# EAGLE board pixelAdapter_f103c8 pro-Panel (EAGLE 9.5.2)
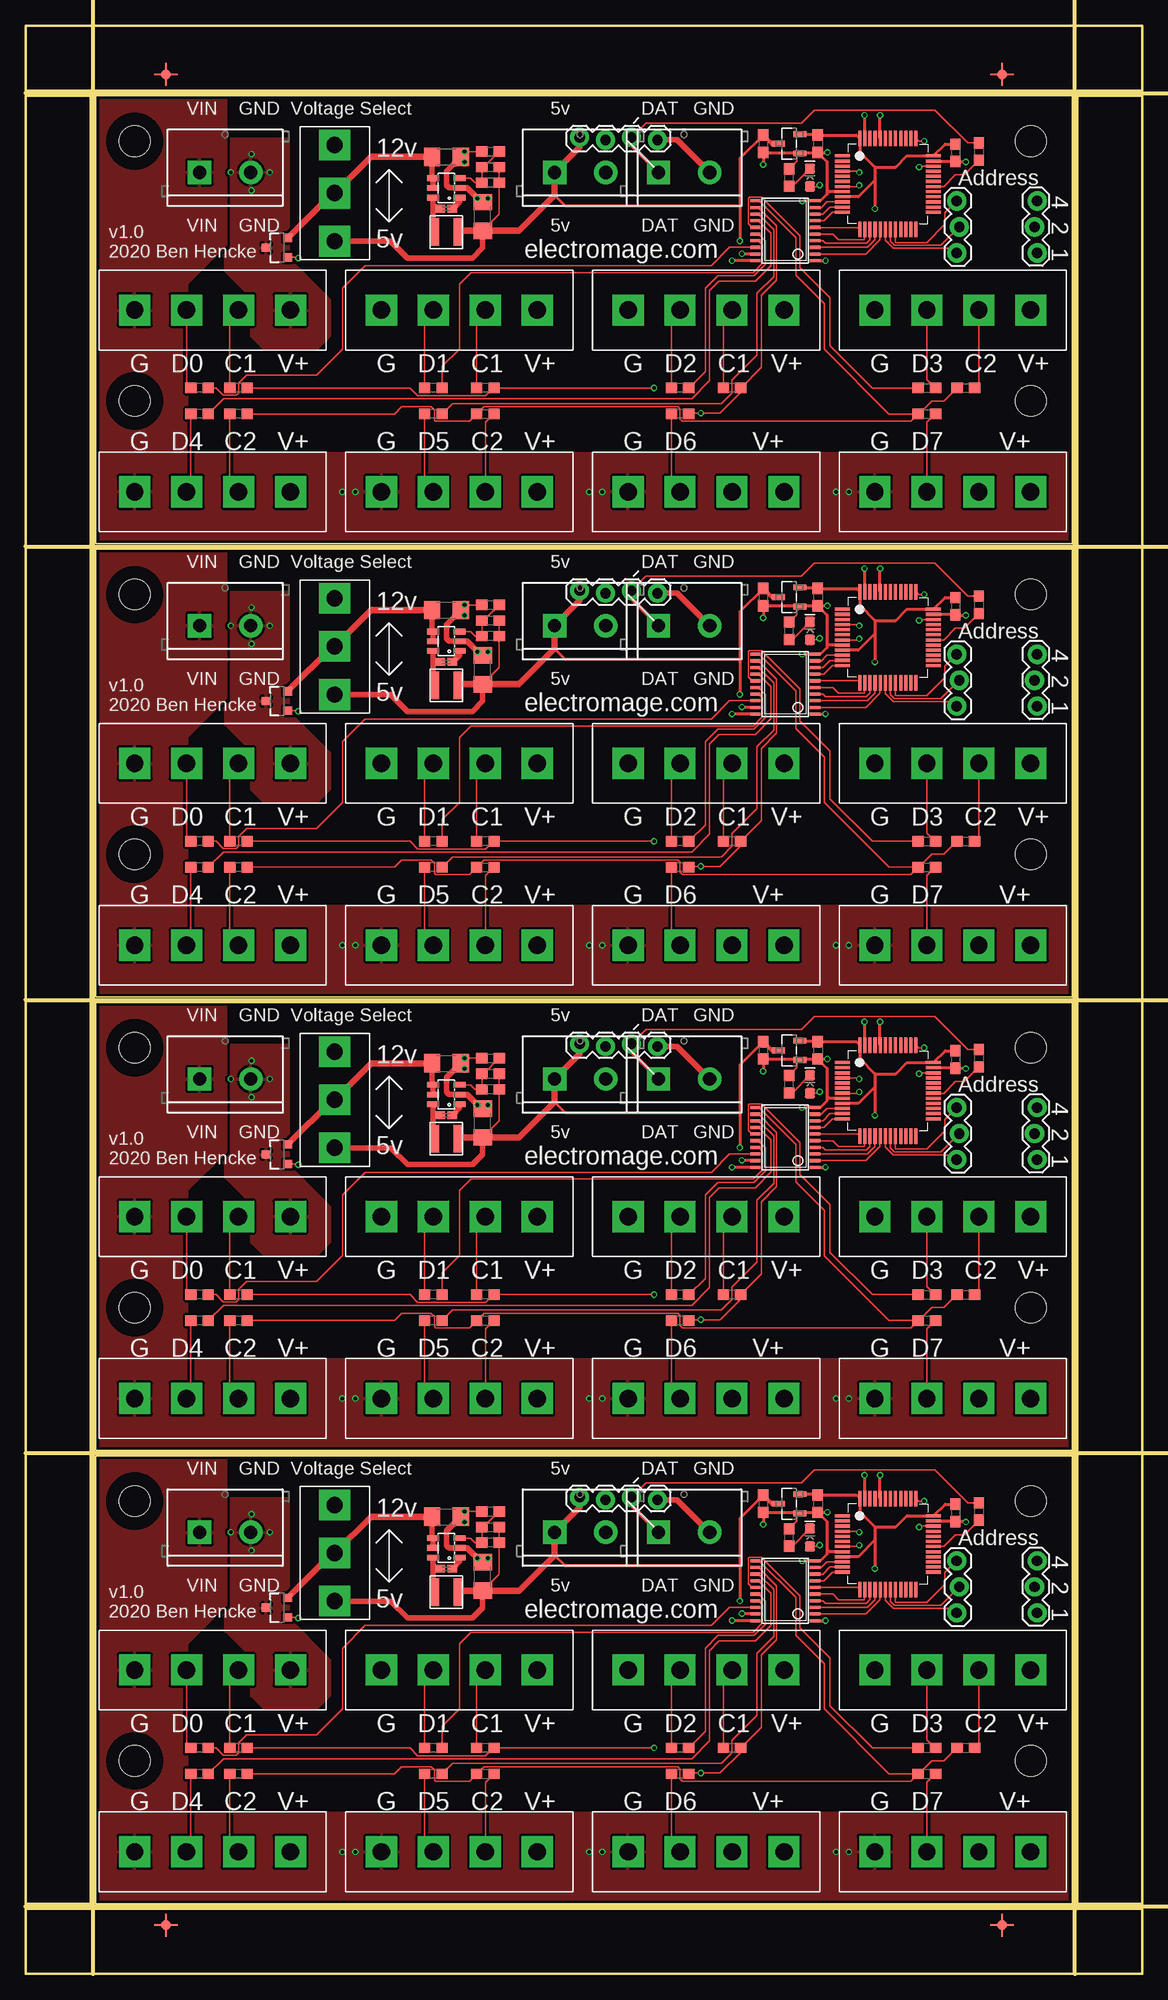
[diagram p0: board, top side]
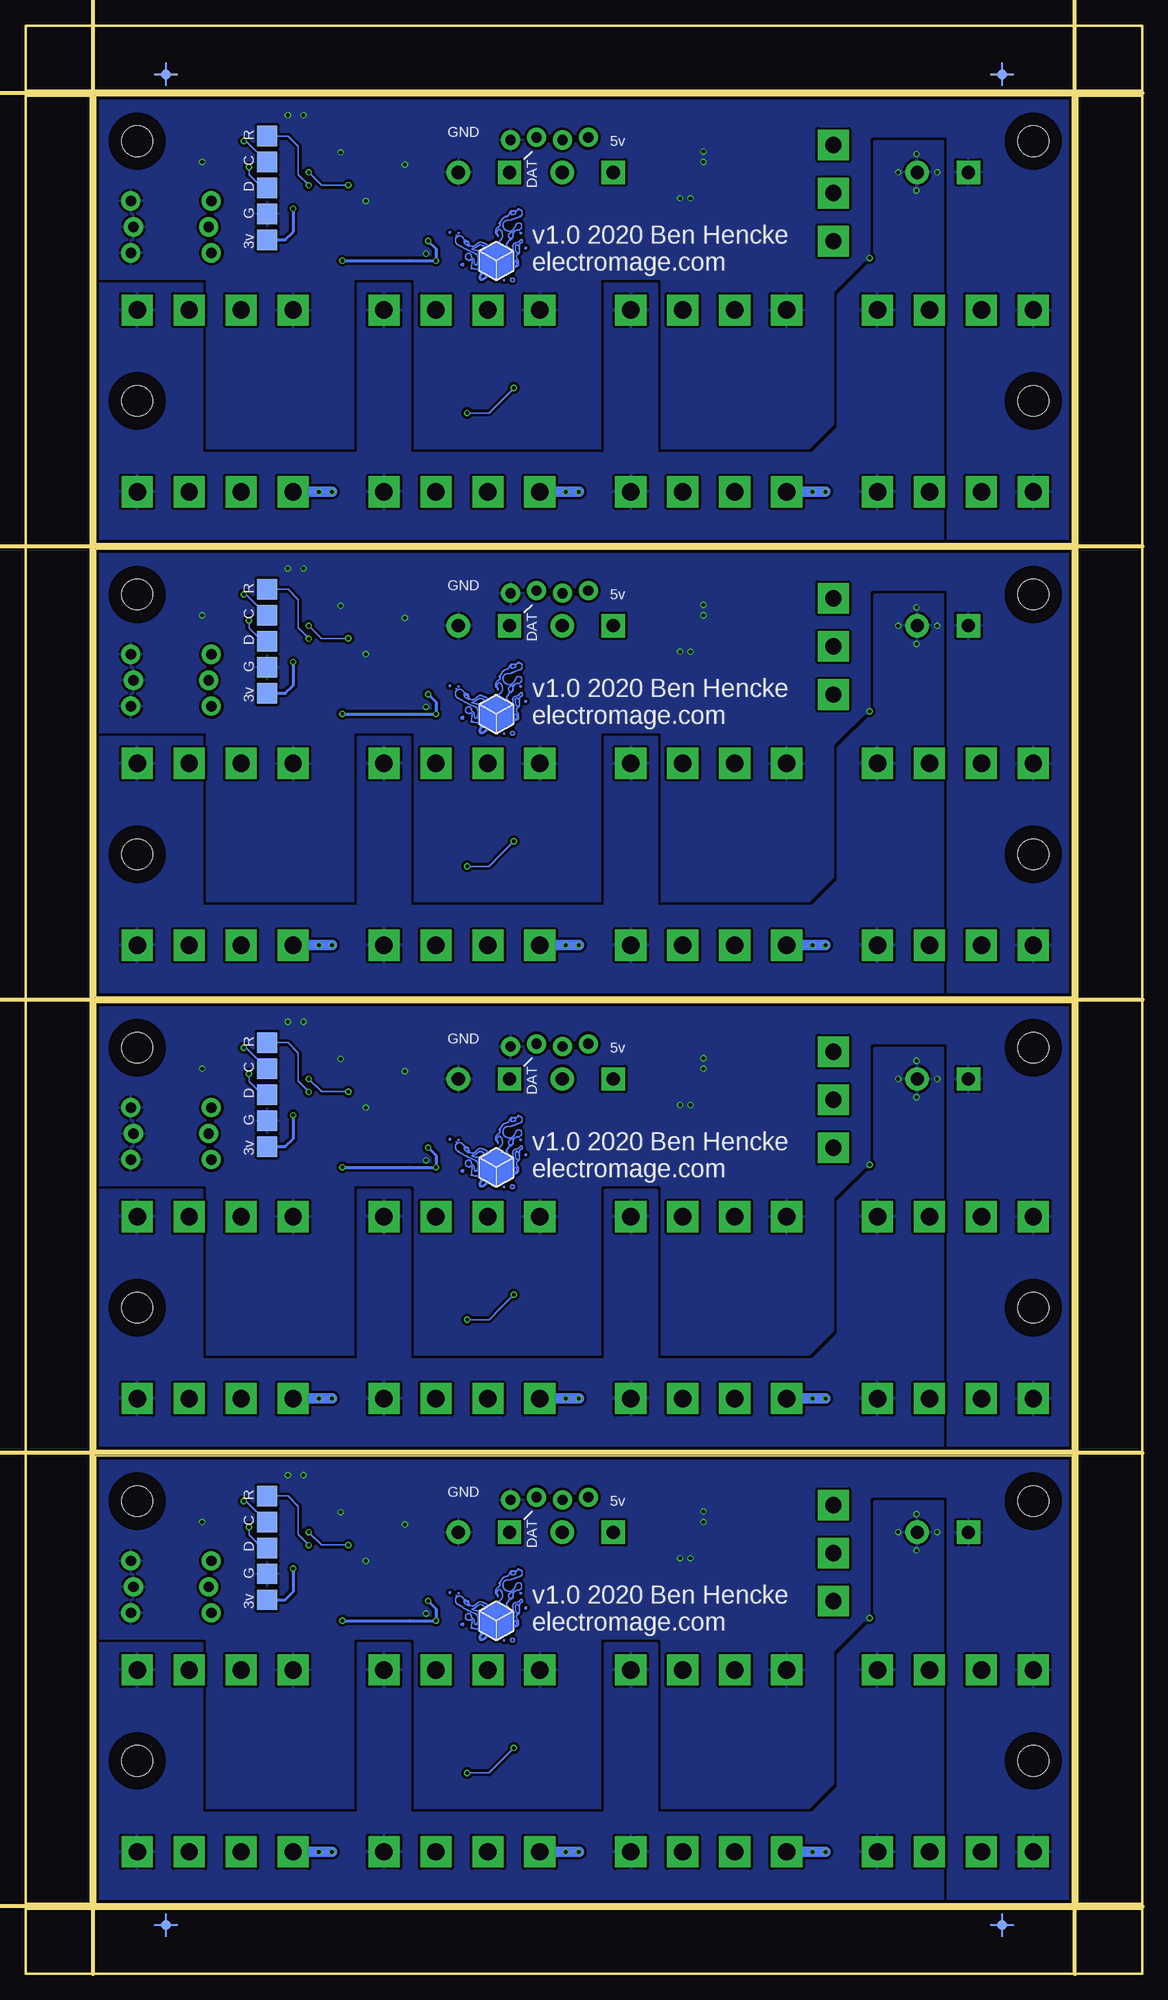
[diagram p1: board, bottom side, seen from below]

Size 109.22 x 190.5 mm. Coordinates in mm from the lower left corner, seen from the top.
Outline: 6.86,6.86 102.36,6.86 102.36,50.67 6.86,50.67 6.86,6.86
Outline: 6.86,51.18 102.36,51.18 102.36,95 6.86,95 6.86,51.18
Outline: 6.86,95.5 102.36,95.5 102.36,139.32 6.86,139.32 6.86,95.5
Outline: 6.86,139.83 102.36,139.83 102.36,183.64 6.86,183.64 6.86,139.83
Outline: 0,6.35 109.22,6.35 109.22,0 0,0 0,6.35
Outline: 102.87,183.64 109.22,183.64 109.22,6.86 102.87,6.86 102.87,183.64
Outline: 0,190.5 109.22,190.5 109.22,184.15 0,184.15 0,190.5
Outline: 0,183.64 6.35,183.64 6.35,6.86 0,6.86 0,183.64
Copper layers (1*2*15*16): Top 0.035559375mm / dielectric 0.47751875mm / Route2 0.035559375mm / dielectric 0.47751875mm / Route15 0.035559375mm / dielectric 0.47751875mm / Bottom 0.035559375mm
Design rules "SparkFun-4-layer-FAB-LIMIT *": minimum track width 4mil, minimum drill 6mil, track to track 5mil, track to pad 5mil, pad to pad 5mil, via to via 5mil, smd to smd 5mil, copper to edge 4mil, drill to drill 4mil, minimum pad ring 5mil, minimum via ring 5mil, stop-mask expansion 1mil, vias tented up to drill 25mil, thermal gap 10mil
Holes 3 mm at 10.67,20.83 98.3,20.83 10.67,46.23 98.3,46.23 10.67,65.15 98.3,65.15 10.67,90.55 98.3,90.55 10.67,109.47 98.3,109.47 10.67,134.87 98.3,134.87 10.67,153.8 98.3,153.8 10.67,179.2 98.3,179.2
tRestrict: area 9.4,19.6 to 11.9,22.1; area 9.4,45 to 11.9,47.5; area 97,45 to 99.6,47.5; area 97,19.6 to 99.6,22.1; area 9.4,63.9 to 11.9,66.4; area 9.4,89.3 to 11.9,91.8; area 97,89.3 to 99.6,91.8; area 97,63.9 to 99.6,66.4; area 9.4,108.2 to 11.9,110.7; area 9.4,133.6 to 11.9,136.1; area 97,133.6 to 99.6,136.1; area 97,108.2 to 99.6,110.7; 4 more areas
bRestrict: area 9.4,19.6 to 11.9,22.1; area 9.4,45 to 11.9,47.5; area 97,45 to 99.6,47.5; area 97,19.6 to 99.6,22.1; area 9.4,63.9 to 11.9,66.4; area 9.4,89.3 to 11.9,91.8; area 97,89.3 to 99.6,91.8; area 97,63.9 to 99.6,66.4; area 9.4,108.2 to 11.9,110.7; area 9.4,133.6 to 11.9,136.1; area 97,133.6 to 99.6,136.1; area 97,108.2 to 99.6,110.7; 4 more areas
Milling: 7 lines

## Footprints (pad centres in the part's own frame; a part is rotated, then mirrored left to right if it is on the bottom)
0603 = smd 1.1 x 1: 1 -0.85,0; 2 0.85,0
1206 = smd 1.6 x 1.8: 1 -1.4,0; 2 1.4,0
C0402K = smd 0.925 x 0.74: 1 -0.6,0; 2 0.6,0
LED-0603 = smd 1 x 1: A -0.877,0; C 0.877,0
BENSFIDUCIAL-SMALL = smd 1 x 1: 1 0,0 | smd 0.152 x 0.762: P$1 0,0.762; P$2 0,-0.762 | smd 0.762 x 0.152: P$3 0.762,0; P$4 -0.762,0
SCREWTERMINAL-5MM-2 = drill 1.3 pad 2.286 square: 1 0,0 | drill 1.3 pad 2.286: 2 5,0
1X03_LOCK = drill 1.016 pad 1.88: 1 0,0.127; 2 2.54,-0.127; 3 5.08,0.127
1X04_LOCK = drill 1.016 pad 1.88: 1 0,0.127; 2 2.54,-0.127; 3 5.08,0.127; 4 7.62,-0.127
INDUCTOR-3030 = smd 0.8 x 2.7: P$1 1.1,0; P$2 -1.1,0
SOT23-3 = smd 0.8 x 0.9: 1 -0.95,-1; 2 0.95,-1; 3 0,1.1
TP20SQ = smd 2 x 2: TP 0,0
TSSOP20 = smd 0.305 x 0.991: 1 -2.925,-2.918; 2 -2.275,-2.918; 3 -1.625,-2.918; 4 -0.975,-2.918; 5 -0.325,-2.918; 6 0.325,-2.918; 7 0.975,-2.918; 8 1.625,-2.918; 9 2.275,-2.918; 10 2.925,-2.918; 11 2.925,2.918; 12 2.275,2.918; 13 1.625,2.918; 14 0.975,2.918; 15 0.325,2.918; 16 -0.325,2.918; 17 -0.975,2.918; 18 -1.625,2.918; 19 -2.275,2.918; 20 -2.925,2.918
SOT95P237X112-3N = smd 0.559 x 1.27: 1 -0.94,-1.041; 2 0.94,-1.041; 3 0,1.041
LQFP48_7X7MM_0.5MMPP = smd 1.5 x 0.3: 1 -4.45,2.75; 2 -4.45,2.25; 3 -4.45,1.75; 4 -4.45,1.25; 5 -4.45,0.75; 6 -4.45,0.25; 7 -4.45,-0.25; 8 -4.45,-0.75; 9 -4.45,-1.25; 10 -4.45,-1.75; 11 -4.45,-2.25; 12 -4.45,-2.75; 25 4.45,-2.75; 26 4.45,-2.25; 27 4.45,-1.75; 28 4.45,-1.25; 29 4.45,-0.75; 30 4.45,-0.25; 31 4.45,0.25; 32 4.45,0.75; 33 4.45,1.25; 34 4.45,1.75; 35 4.45,2.25; 36 4.45,2.75 | smd 0.3 x 1.5: 13 -2.75,-4.45; 14 -2.25,-4.45; 15 -1.75,-4.45; 16 -1.25,-4.45; 17 -0.75,-4.45; 18 -0.25,-4.45; 19 0.25,-4.45; 20 0.75,-4.45; 21 1.25,-4.45; 22 1.75,-4.45; 23 2.25,-4.45; 24 2.75,-4.45; 37 2.75,4.45; 38 2.25,4.45; 39 1.75,4.45; 40 1.25,4.45; 41 0.75,4.45; 42 0.25,4.45; 43 -0.25,4.45; 44 -0.75,4.45; 45 -1.25,4.45; 46 -1.75,4.45; 47 -2.25,4.45; 48 -2.75,4.45
CON4-508 = drill 1.7 pad 3.048 square: 1 -7.62,0; 2 -2.54,0; 3 2.54,0; 4 7.62,0
SOT23-6 = smd 0.55 x 1.2: 1 -0.95,-1.3; 2 0,-1.3; 3 0.95,-1.3; 4 0.95,1.3; 5 0,1.3; 6 -0.95,1.3
SWITCH-XKB-SS-12D10 = drill 1.6 pad 3 square: P$1 -4.7,0; P$2 0,0; P$3 4.7,0

## Placement (x,y rotation side)
C1  1.0uF  [0603]  72.14,45.97 270 top
C2  4.7uF  [0603]  77.47,45.97 270 top
C3  0.1uF  [0603]  90.93,45.08 270 top
C4  47uF  [1206]  44.7,38.86 90 top
C5  4.7uF  [1206]  41.15,44.7 0 top
C6  0.1uF  [C0402K]  41.15,39.62 180 top
C7  22pF  [0603]  45.47,42.16 180 top
C8  0.1uF  [0603]  90.93,89.41 270 top
C9  4.7uF  [0603]  77.47,90.3 270 top
C10  4.7uF  [1206]  41.15,89.03 0 top
C11  22pF  [0603]  45.47,86.49 180 top
C12  47uF  [1206]  44.7,83.19 90 top
C13  0.1uF  [C0402K]  41.15,83.95 180 top
C14  1.0uF  [0603]  72.14,90.3 270 top
C15  0.1uF  [0603]  90.93,133.73 270 top
C16  4.7uF  [0603]  77.47,134.62 270 top
C17  4.7uF  [1206]  41.15,133.35 0 top
C18  22pF  [0603]  45.47,130.81 180 top
C19  47uF  [1206]  44.7,127.51 90 top
C20  0.1uF  [C0402K]  41.15,128.27 180 top
C21  1.0uF  [0603]  72.14,134.62 270 top
C22  0.1uF  [0603]  90.93,178.05 270 top
C23  4.7uF  [0603]  77.47,178.94 270 top
C24  4.7uF  [1206]  41.15,177.67 0 top
C25  22pF  [0603]  45.47,175.13 180 top
C26  47uF  [1206]  44.7,171.83 90 top
C27  0.1uF  [C0402K]  41.15,172.59 180 top
C28  1.0uF  [0603]  72.14,178.94 270 top
D1  [LED-0603]  76.71,87 90 top
D2  [LED-0603]  76.71,42.67 90 top
D3  [LED-0603]  76.71,131.32 90 top
D4  [LED-0603]  76.71,175.64 90 top
E$1  [BENSFIDUCIAL-SMALL]  13.72,185.74 0 top
E$2  [BENSFIDUCIAL-SMALL]  13.72,185.74 0 bottom
E$3  [BENSFIDUCIAL-SMALL]  95.5,185.74 0 top
E$4  [BENSFIDUCIAL-SMALL]  95.5,185.74 0 bottom
E$5  [BENSFIDUCIAL-SMALL]  13.72,4.76 0 top
E$6  [BENSFIDUCIAL-SMALL]  13.72,4.76 0 bottom
E$7  [BENSFIDUCIAL-SMALL]  95.5,4.76 0 top
E$8  [BENSFIDUCIAL-SMALL]  95.5,4.76 0 bottom
J1  [SCREWTERMINAL-5MM-2]  17.02,43.18 0 top
J2  [1X03_LOCK]  91.19,35.31 90 top
J3  [SCREWTERMINAL-5MM-2]  51.74,43.18 0 top
J4  [SCREWTERMINAL-5MM-2]  61.9,43.18 0 top
J5  [1X04_LOCK]  61.8,46.48 180 top
J6  [1X03_LOCK]  98.81,40.39 270 top
J7  [SCREWTERMINAL-5MM-2]  51.74,87.5 0 top
J8  [SCREWTERMINAL-5MM-2]  61.9,87.5 0 top
J9  [1X04_LOCK]  61.8,90.8 180 top
J10  [SCREWTERMINAL-5MM-2]  17.02,87.5 0 top
J11  [1X03_LOCK]  91.19,79.63 90 top
J12  [1X03_LOCK]  98.81,84.71 270 top
J13  [SCREWTERMINAL-5MM-2]  51.74,131.83 0 top
J14  [SCREWTERMINAL-5MM-2]  61.9,131.83 0 top
J15  [1X04_LOCK]  61.8,135.13 180 top
J16  [SCREWTERMINAL-5MM-2]  17.02,131.83 0 top
J17  [1X03_LOCK]  91.19,123.95 90 top
J18  [1X03_LOCK]  98.81,129.03 270 top
J19  [SCREWTERMINAL-5MM-2]  51.74,176.15 0 top
J20  [SCREWTERMINAL-5MM-2]  61.9,176.15 0 top
J21  [1X04_LOCK]  61.8,179.45 180 top
J22  [SCREWTERMINAL-5MM-2]  17.02,176.15 0 top
J23  [1X03_LOCK]  91.19,168.28 90 top
J24  [1X03_LOCK]  98.81,173.36 270 top
L1  INDUCTOR3030  [INDUCTOR-3030]  41.15,81.66 180 top
L2  INDUCTOR3030  [INDUCTOR-3030]  41.15,37.34 180 top
L3  INDUCTOR3030  [INDUCTOR-3030]  41.15,125.98 180 top
L4  INDUCTOR3030  [INDUCTOR-3030]  41.15,170.31 180 top
Q1  2.5A/30V/105mΩ  [SOT23-3]  24.64,80.14 90 top
Q2  2.5A/30V/105mΩ  [SOT23-3]  24.64,124.46 90 top
Q3  2.5A/30V/105mΩ  [SOT23-3]  24.64,35.81 90 top
Q4  2.5A/30V/105mΩ  [SOT23-3]  24.64,168.78 90 top
R1  75  [0603]  17.02,22.1 180 top
R2  75  [0603]  39.88,22.1 180 top
R3  75  [0603]  64.01,22.1 180 top
R4  75  [0603]  88.14,22.1 0 top
R5  75  [0603]  17.02,19.56 180 top
R6  75  [0603]  39.88,19.56 180 top
R7  75  [0603]  64.01,19.56 180 top
R8  75  [0603]  88.14,19.56 0 top
R9  75  [0603]  93.22,45.21 270 top
R10  75  [0603]  74.68,42.67 90 top
R11  100k  [0603]  45.47,43.69 0 top
R12  13.7k  [0603]  45.47,45.21 0 top
R13  75  [0603]  20.83,22.1 180 top
R14  75  [0603]  44.96,22.1 180 top
R15  75  [0603]  69.09,22.1 180 top
R16  75  [0603]  91.95,22.1 0 top
R17  75  [0603]  20.83,19.56 180 top
R18  75  [0603]  44.96,19.56 0 top
R19  75  [0603]  17.02,66.42 180 top
R20  75  [0603]  39.88,66.42 180 top
R21  75  [0603]  64.01,66.42 180 top
R22  75  [0603]  88.14,66.42 0 top
R23  75  [0603]  17.02,63.88 180 top
R24  75  [0603]  39.88,63.88 180 top
R25  75  [0603]  64.01,63.88 180 top
R26  75  [0603]  88.14,63.88 0 top
R27  75  [0603]  74.68,87 90 top
R28  75  [0603]  93.22,89.54 270 top
R29  100k  [0603]  45.47,88.01 0 top
R30  13.7k  [0603]  45.47,89.54 0 top
R31  75  [0603]  20.83,66.42 180 top
R32  75  [0603]  44.96,66.42 180 top
R33  75  [0603]  69.09,66.42 180 top
R34  75  [0603]  91.95,66.42 0 top
R35  75  [0603]  20.83,63.88 180 top
R36  75  [0603]  44.96,63.88 0 top
R37  75  [0603]  17.02,110.74 180 top
R38  75  [0603]  39.88,110.74 180 top
R39  75  [0603]  64.01,110.74 180 top
R40  75  [0603]  88.14,110.74 0 top
R41  75  [0603]  17.02,108.2 180 top
R42  75  [0603]  39.88,108.2 180 top
R43  75  [0603]  64.01,108.2 180 top
R44  75  [0603]  88.14,108.2 0 top
R45  75  [0603]  74.68,131.32 90 top
R46  75  [0603]  93.22,133.86 270 top
R47  100k  [0603]  45.47,132.33 0 top
R48  13.7k  [0603]  45.47,133.86 0 top
R49  75  [0603]  20.83,110.74 180 top
R50  75  [0603]  44.96,110.74 180 top
R51  75  [0603]  69.09,110.74 180 top
R52  75  [0603]  91.95,110.74 0 top
R53  75  [0603]  20.83,108.2 180 top
R54  75  [0603]  44.96,108.2 0 top
R55  75  [0603]  17.02,155.07 180 top
R56  75  [0603]  39.88,155.07 180 top
R57  75  [0603]  64.01,155.07 180 top
R58  75  [0603]  88.14,155.07 0 top
R59  75  [0603]  17.02,152.53 180 top
R60  75  [0603]  39.88,152.53 180 top
R61  75  [0603]  64.01,152.53 180 top
R62  75  [0603]  88.14,152.53 0 top
R63  75  [0603]  74.68,175.64 90 top
R64  75  [0603]  93.22,178.18 270 top
R65  100k  [0603]  45.47,176.66 0 top
R66  13.7k  [0603]  45.47,178.18 0 top
R67  75  [0603]  20.83,155.07 180 top
R68  75  [0603]  44.96,155.07 180 top
R69  75  [0603]  69.09,155.07 180 top
R70  75  [0603]  91.95,155.07 0 top
R71  75  [0603]  20.83,152.53 180 top
R72  75  [0603]  44.96,152.53 0 top
TP1  TPTP20SQ  [TP20SQ]  85.6,44.2 0 bottom
TP2  TPTP20SQ  [TP20SQ]  85.6,41.66 0 bottom
TP3  TPTP20SQ  [TP20SQ]  85.6,39.12 0 bottom
TP4  TPTP20SQ  [TP20SQ]  85.6,36.58 0 bottom
TP5  TPTP20SQ  [TP20SQ]  85.6,46.74 180 bottom
TP6  TPTP20SQ  [TP20SQ]  85.6,88.52 0 bottom
TP7  TPTP20SQ  [TP20SQ]  85.6,85.98 0 bottom
TP8  TPTP20SQ  [TP20SQ]  85.6,83.44 0 bottom
TP9  TPTP20SQ  [TP20SQ]  85.6,80.9 0 bottom
TP10  TPTP20SQ  [TP20SQ]  85.6,91.06 180 bottom
TP11  TPTP20SQ  [TP20SQ]  85.6,132.84 0 bottom
TP12  TPTP20SQ  [TP20SQ]  85.6,130.3 0 bottom
TP13  TPTP20SQ  [TP20SQ]  85.6,127.76 0 bottom
TP14  TPTP20SQ  [TP20SQ]  85.6,125.22 0 bottom
TP15  TPTP20SQ  [TP20SQ]  85.6,135.38 180 bottom
TP16  TPTP20SQ  [TP20SQ]  85.6,177.16 0 bottom
TP17  TPTP20SQ  [TP20SQ]  85.6,174.62 0 bottom
TP18  TPTP20SQ  [TP20SQ]  85.6,172.09 0 bottom
TP19  TPTP20SQ  [TP20SQ]  85.6,169.55 0 bottom
TP20  TPTP20SQ  [TP20SQ]  85.6,179.71 180 bottom
U1  SN74HCT245PWR  [TSSOP20]  74.3,37.46 90 top
U2  AP2120N-3.3TRG1  [SOT95P237X112-3N]  74.68,45.97 90 top
U3  SN74HCT245PWR  [TSSOP20]  74.3,81.79 90 top
U4  AP2120N-3.3TRG1  [SOT95P237X112-3N]  74.68,90.3 90 top
U5  SN74HCT245PWR  [TSSOP20]  74.3,126.11 90 top
U6  AP2120N-3.3TRG1  [SOT95P237X112-3N]  74.68,134.62 90 top
U7  SN74HCT245PWR  [TSSOP20]  74.3,170.43 90 top
U8  AP2120N-3.3TRG1  [SOT95P237X112-3N]  74.68,178.94 90 top
U$1  STM32F103C8T6  [LQFP48_7X7MM_0.5MMPP]  84.33,42.04 0 top
U$2  CON4-508  [CON4-508]  18.29,29.72 0 top
U$3  CON4-508  [CON4-508]  42.42,29.72 0 top
U$4  SY8120B1ABC  [SOT23-6]  41.15,41.66 90 top
U$5  CON4-508  [CON4-508]  66.55,29.72 0 top
U$6  CON4-508  [CON4-508]  90.68,29.72 0 top
U$7  CON4-508  [CON4-508]  18.29,11.94 0 top
U$8  CON4-508  [CON4-508]  42.42,11.94 0 top
U$9  CON4-508  [CON4-508]  66.55,11.94 0 top
U$10  CON4-508  [CON4-508]  90.68,11.94 0 top
U$11  SWITCH-SPDTXKB-SS-12D10  [SWITCH-XKB-SS-12D10]  30.23,41.15 270 top
U$12  [ELECTRO_MAGE_PCB4_PIXEL_2#PNG]  64.01,36.07 0 bottom
U$13  STM32F103C8T6  [LQFP48_7X7MM_0.5MMPP]  84.33,86.36 0 top
U$14  SY8120B1ABC  [SOT23-6]  41.15,85.98 90 top
U$15  CON4-508  [CON4-508]  18.29,74.04 0 top
U$16  CON4-508  [CON4-508]  42.42,74.04 0 top
U$17  CON4-508  [CON4-508]  66.55,74.04 0 top
U$18  CON4-508  [CON4-508]  90.68,74.04 0 top
U$19  CON4-508  [CON4-508]  18.29,56.26 0 top
U$20  CON4-508  [CON4-508]  42.42,56.26 0 top
U$21  CON4-508  [CON4-508]  66.55,56.26 0 top
U$22  CON4-508  [CON4-508]  90.68,56.26 0 top
U$23  SWITCH-SPDTXKB-SS-12D10  [SWITCH-XKB-SS-12D10]  30.23,85.47 270 top
U$24  [ELECTRO_MAGE_PCB4_PIXEL_2#PNG]  64.01,80.39 0 bottom
U$25  STM32F103C8T6  [LQFP48_7X7MM_0.5MMPP]  84.33,130.68 0 top
U$26  SY8120B1ABC  [SOT23-6]  41.15,130.3 90 top
U$27  CON4-508  [CON4-508]  18.29,118.36 0 top
U$28  CON4-508  [CON4-508]  42.42,118.36 0 top
U$29  CON4-508  [CON4-508]  66.55,118.36 0 top
U$30  CON4-508  [CON4-508]  90.68,118.36 0 top
U$31  CON4-508  [CON4-508]  18.29,100.58 0 top
U$32  CON4-508  [CON4-508]  42.42,100.58 0 top
U$33  CON4-508  [CON4-508]  66.55,100.58 0 top
U$34  CON4-508  [CON4-508]  90.68,100.58 0 top
U$35  SWITCH-SPDTXKB-SS-12D10  [SWITCH-XKB-SS-12D10]  30.23,129.79 270 top
U$36  [ELECTRO_MAGE_PCB4_PIXEL_2#PNG]  64.01,124.71 0 bottom
U$37  STM32F103C8T6  [LQFP48_7X7MM_0.5MMPP]  84.33,175.01 0 top
U$38  SY8120B1ABC  [SOT23-6]  41.15,174.62 90 top
U$39  CON4-508  [CON4-508]  18.29,162.69 0 top
U$40  CON4-508  [CON4-508]  42.42,162.69 0 top
U$41  CON4-508  [CON4-508]  66.55,162.69 0 top
U$42  CON4-508  [CON4-508]  90.68,162.69 0 top
U$43  CON4-508  [CON4-508]  18.29,144.91 0 top
U$44  CON4-508  [CON4-508]  42.42,144.91 0 top
U$45  CON4-508  [CON4-508]  66.55,144.91 0 top
U$46  CON4-508  [CON4-508]  90.68,144.91 0 top
U$47  SWITCH-SPDTXKB-SS-12D10  [SWITCH-XKB-SS-12D10]  30.23,174.12 270 top
U$48  [ELECTRO_MAGE_PCB4_PIXEL_2#PNG]  64.01,169.04 0 bottom

## Library data of the parts
C1 C14 C21 C28 = SparkFun-Capacitors; PROD_ID: CAP-00868
C2 C9 C16 C23 = SparkFun-Capacitors; PROD_ID: CAP-08280
C3 C8 C15 C22 = SparkFun-Capacitors; PROD_ID: CAP-00810
C4 C5 C10 C12 C17 C19 C24 C26 = SparkFun-Capacitors; PROD_ID: CAP-10300
C6 C13 C20 C27 = adafruit
C7 C11 C18 C25 = SparkFun-Capacitors; PROD_ID: CAP-07876
D1-D4 = SparkFun-LED
E$1-E$8 L1-L4 U$2-U$11 U$14-U$23 U$26-U$35 U$38-U$47 = bens
J1 J3 J4 J7 J8 J10 J13 J14 J16 J19 J20 J22 = bens; SF_SKU: PRT-08432
J2 J6 J11 J12 J17 J18 J23 J24 = SparkFun-Connectors
J5 J9 J15 J21 = SparkFun-Connectors; PROD_ID: CONN-09696
Q1-Q4 = SparkFun-DiscreteSemi; PROD_ID: TRANS-11308
R1-R10 R13-R28 R31-R46 R49-R64 R67-R72 = SparkFun-Resistors; PROD_ID: RES-12438
R11 R29 R47 R65 = SparkFun-Resistors; PROD_ID: RES-07828
R12 R30 R48 R66 = SparkFun-Resistors; PROD_ID: RES-08603
TP1-TP20 = testpad
U1 U3 U5 U7 = scanlime
U2 U4 U6 U8 = Microchip_By_element14_Batch_1; MPN: MCP1700T-3302E/TT; OC_FARNELL: 1296592; OC_NEWARK: 88H9817; PACKAGE: SOT23-3; SUPPLIER: Microchip
U$1 U$13 U$25 U$37 = STM32F103C8T6; AVAILABILITY: Unavailable; DESCRIPTION: Mainstream Performance line, ARM Cortex-M3 MCU with 64 Kbytes Flash, 72 MHz CPU, motor control, USB and CAN; MF: STMicroelectronics; MP: STM32F103C8T6; PACKAGE: LQFP-48 STMicroelectronics; PRICE: None
U$12 U$24 U$36 U$48 = Electro_Mage_pcb4_pixel_6

## Nets
+3V1: C8.1 C9.1 TP9.TP U4.2 U$13.9 U$13.36 U$13.48
+3V2: C15.1 C16.1 TP14.TP U6.2 U$25.9 U$25.36 U$25.48
+3V3: C2.1 C3.1 TP4.TP U2.2 U$1.9 U$1.36 U$1.48
+3V4: C22.1 C23.1 TP19.TP U8.2 U$37.9 U$37.36 U$37.48
+5V: C1.1 C4.1 C7.1 J3.1 J5.4 L2.P$2 R11.2 U1.1 U1.20 U2.3 U$11.P$3
+5V1: C11.1 C12.1 C14.1 J7.1 J9.4 L1.P$2 R29.2 U3.1 U3.20 U4.3 U$23.P$3
+5V2: C18.1 C19.1 C21.1 J13.1 J15.4 L3.P$2 R47.2 U5.1 U5.20 U6.3 U$35.P$3
+5V3: C25.1 C26.1 C28.1 J19.1 J21.4 L4.P$2 R65.2 U7.1 U7.20 U8.3 U$47.P$3
ADDR0: J2.1 U$1.18
ADDR1: J2.2 U$1.19
ADDR2: J2.3 U$1.20
ADDR3: J11.1 U$13.18
ADDR4: J11.2 U$13.19
ADDR5: J11.3 U$13.20
ADDR6: J17.1 U$25.18
ADDR7: J17.2 U$25.19
ADDR8: J17.3 U$25.20
ADDR9: J23.1 U$37.18
ADDR10: J23.2 U$37.19
ADDR11: J23.3 U$37.20
CH0: U1.2 U$1.17
CH1: U1.3 U$1.16
CH2: U1.4 U$1.15
CH3: U1.5 U$1.14
CH4: U1.6 U$1.13
CH5: U1.7 U$1.12
CH6: U1.8 U$1.11
CH7: U1.9 U$1.10
CH8: U3.9 U$13.10
CH9: U3.8 U$13.11
CH10: U3.7 U$13.12
CH11: U3.2 U$13.17
CH12: U3.3 U$13.16
CH13: U3.4 U$13.15
CH14: U3.5 U$13.14
CH15: U3.6 U$13.13
CH16: U5.9 U$25.10
CH17: U5.8 U$25.11
CH18: U5.7 U$25.12
CH19: U5.2 U$25.17
CH20: U5.3 U$25.16
CH21: U5.4 U$25.15
CH22: U5.5 U$25.14
CH23: U5.6 U$25.13
CH24: U7.9 U$37.10
CH25: U7.8 U$37.11
CH26: U7.7 U$37.12
CH27: U7.2 U$37.17
CH28: U7.3 U$37.16
CH29: U7.4 U$37.15
CH30: U7.5 U$37.14
CH31: U7.6 U$37.13
GND: C1.2 C2.2 C3.2 C4.2 C5.2 J1.1 J4.2 J5.1 J6.1 J6.2 J6.3 Q3.1 R10.2 R12.1 TP3.TP U1.10 U1.19 U2.1 U$1.8 U$1.35 U$1.44 U$1.47 U$2.1 U$3.1 U$4.2 U$5.1 U$6.1 U$7.1 U$8.1 U$9.1 U$10.1
GND1: C8.2 C9.2 C10.2 C12.2 C14.2 J8.2 J9.1 J10.1 J12.1 J12.2 J12.3 Q1.1 R27.2 R30.1 TP8.TP U3.10 U3.19 U4.1 U$13.8 U$13.35 U$13.44 U$13.47 U$14.2 U$15.1 U$16.1 U$17.1 U$18.1 U$19.1 U$20.1 U$21.1 U$22.1
GND2: C15.2 C16.2 C17.2 C19.2 C21.2 J14.2 J15.1 J16.1 J18.1 J18.2 J18.3 Q2.1 R45.2 R48.1 TP13.TP U5.10 U5.19 U6.1 U$25.8 U$25.35 U$25.44 U$25.47 U$26.2 U$27.1 U$28.1 U$29.1 U$30.1 U$31.1 U$32.1 U$33.1 U$34.1
GND3: C22.2 C23.2 C24.2 C26.2 C28.2 J20.2 J21.1 J22.1 J24.1 J24.2 J24.3 Q4.1 R63.2 R66.1 TP18.TP U7.10 U7.19 U8.1 U$37.8 U$37.35 U$37.44 U$37.47 U$38.2 U$39.1 U$40.1 U$41.1 U$42.1 U$43.1 U$44.1 U$45.1 U$46.1
LED0: R1.2 U$2.2
LED1: R2.2 U$3.2
LED2: R3.2 U$5.2
LED3: R4.2 U$6.2
LED4: R5.2 U$7.2
LED5: R6.2 U$8.2
LED6: R7.2 U$9.2
LED7: R8.2 U$10.2
LED8: R24.2 U$20.2
LED9: R23.2 U$19.2
LED10: R22.2 U$18.2
LED11: R21.2 U$17.2
LED12: R20.2 U$16.2
LED13: R19.2 U$15.2
LED14: R25.2 U$21.2
LED15: R26.2 U$22.2
LED16: R42.2 U$32.2
LED17: R41.2 U$31.2
LED18: R40.2 U$30.2
LED19: R39.2 U$29.2
LED20: R38.2 U$28.2
LED21: R37.2 U$27.2
LED22: R43.2 U$33.2
LED23: R44.2 U$34.2
LED24: R60.2 U$44.2
LED25: R59.2 U$43.2
LED26: R58.2 U$42.2
LED27: R57.2 U$41.2
LED28: R56.2 U$40.2
LED29: R55.2 U$39.2
LED30: R61.2 U$45.2
LED31: R62.2 U$46.2
LEDS0: R1.1 U1.18
LEDS1: R2.1 U1.17
LEDS2: R3.1 U1.16
LEDS3: R4.1 U1.15
LEDS4: R5.1 U1.14
LEDS5: R6.1 U1.13
LEDS6: R7.1 R13.1 R14.1 R15.1 U1.12
LEDS7: R8.1 R16.1 R17.1 R18.1 U1.11
LEDS8: R19.1 U3.18
LEDS9: R20.1 U3.17
LEDS10: R21.1 U3.16
LEDS11: R22.1 U3.15
LEDS12: R23.1 U3.14
LEDS13: R24.1 U3.13
LEDS14: R25.1 R31.1 R32.1 R33.1 U3.12
LEDS15: R26.1 R34.1 R35.1 R36.1 U3.11
LEDS16: R37.1 U5.18
LEDS17: R38.1 U5.17
LEDS18: R39.1 U5.16
LEDS19: R40.1 U5.15
LEDS20: R41.1 U5.14
LEDS21: R42.1 U5.13
LEDS22: R43.1 R49.1 R50.1 R51.1 U5.12
LEDS23: R44.1 R52.1 R53.1 R54.1 U5.11
LEDS24: R55.1 U7.18
LEDS25: R56.1 U7.17
LEDS26: R57.1 U7.16
LEDS27: R58.1 U7.15
LEDS28: R59.1 U7.14
LEDS29: R60.1 U7.13
LEDS30: R61.1 R67.1 R68.1 R69.1 U7.12
LEDS31: R62.1 R70.1 R71.1 R72.1 U7.11
N$1: J4.1 J5.2 R9.1
N$2: D1.C R27.1
N$3: D2.A U$1.4
N$4: J8.1 J9.2 R28.1
N$5: D1.A U$13.4
N$6: R13.2 U$2.3
N$7: R14.2 U$3.3
N$8: C6.1 U$4.1
N$9: C6.2 L2.P$1 U$4.6
N$10: C7.2 R11.1 R12.2 U$4.3
N$11: R15.2 U$5.3
N$12: C13.1 U$14.1
N$13: C13.2 L1.P$1 U$14.6
N$14: C11.2 R29.1 R30.2 U$14.3
N$15: R31.2 U$15.3
N$16: R32.2 U$16.3
N$17: R33.2 U$17.3
N$18: R34.2 U$18.3
N$19: R35.2 U$19.3
N$20: R16.2 U$6.3
N$21: D2.C R10.1
N$22: R17.2 U$7.3
N$23: R18.2 U$8.3
N$24: R36.2 U$20.3
N$25: D3.C R45.1
N$26: J14.1 J15.2 R46.1
N$27: D3.A U$25.4
N$28: C20.1 U$26.1
N$29: C20.2 L3.P$1 U$26.6
N$30: C18.2 R47.1 R48.2 U$26.3
N$31: R49.2 U$27.3
N$32: R50.2 U$28.3
N$33: R51.2 U$29.3
N$34: R52.2 U$30.3
N$35: R53.2 U$31.3
N$36: R54.2 U$32.3
N$37: D4.C R63.1
N$38: J20.1 J21.2 R64.1
N$39: D4.A U$37.4
N$40: C27.1 U$38.1
N$41: C27.2 L4.P$1 U$38.6
N$42: C25.2 R65.1 R66.2 U$38.3
N$43: R67.2 U$39.3
N$44: R68.2 U$40.3
N$45: R69.2 U$41.3
N$46: R70.2 U$42.3
N$47: R71.2 U$43.3
N$48: R72.2 U$44.3
NRST: TP5.TP U$1.7
NRST1: TP10.TP U$13.7
NRST2: TP15.TP U$25.7
NRST3: TP20.TP U$37.7
RX: R9.2 U$1.30
RX1: R28.2 U$13.30
RX2: R46.2 U$25.30
RX3: R64.2 U$37.30
SWCLK: TP1.TP U$1.37
SWCLK1: TP6.TP U$13.37
SWCLK2: TP11.TP U$25.37
SWCLK3: TP16.TP U$37.37
SWDIO: TP2.TP U$1.34
SWDIO1: TP7.TP U$13.34
SWDIO2: TP12.TP U$25.34
SWDIO3: TP17.TP U$37.34
VIN: J1.2 Q3.3 U$2.4 U$3.4 U$5.4 U$6.4 U$7.4 U$8.4 U$9.4 U$10.4
VIN1: C5.1 Q3.2 U$4.4 U$4.5 U$11.P$2
VIN2: J10.2 Q1.3 U$15.4 U$16.4 U$17.4 U$18.4 U$19.4 U$20.4 U$21.4 U$22.4
VIN3: C10.1 Q1.2 U$14.4 U$14.5 U$23.P$2
VIN4: J16.2 Q2.3 U$27.4 U$28.4 U$29.4 U$30.4 U$31.4 U$32.4 U$33.4 U$34.4
VIN5: C17.1 Q2.2 U$26.4 U$26.5 U$35.P$2
VIN6: J22.2 Q4.3 U$39.4 U$40.4 U$41.4 U$42.4 U$43.4 U$44.4 U$45.4 U$46.4
VIN7: C24.1 Q4.2 U$38.4 U$38.5 U$47.P$2

## Tracks (layer width: path | path; a pad name or v marks a point on that pad's centre or on a via)
+3V1  (via drill 0.35)
  Top 0.305: U4.2 77.38,91.24 C9.1 81.24,91.15 U$13.48 81.58,89.49 83.06,88.01 | 83.06,88.01 85.09,88.01 86.19,89.11 U$13.36 89.93,90.26 C8.1 | 83.06,88.01 83.06,86.74 | U$13.9 81.43,85.11 83.06,86.74 | 83.06,86.74 v83.06,83.95
  Bottom 0.305: TP9.TP 83.82,80.9 83.06,81.66 v83.06,83.95
+3V2  (via drill 0.35)
  Top 0.305: U6.2 77.38,135.56 C16.1 81.24,135.47 U$25.48 81.58,133.81 83.06,132.33 | 83.06,132.33 85.09,132.33 86.19,133.43 U$25.36 89.93,134.58 C15.1 | 83.06,132.33 83.06,131.06 | U$25.9 81.43,129.43 83.06,131.06 | 83.06,131.06 v83.06,128.27
  Bottom 0.305: TP14.TP 83.82,125.22 83.06,125.98 v83.06,128.27
+3V3  (via drill 0.35)
  Top 0.305: U2.2 77.38,46.91 C2.1 81.24,46.82 U$1.48 81.58,45.17 83.06,43.69 | 83.06,43.69 85.09,43.69 86.19,44.79 U$1.36 89.93,45.93 C3.1 | 83.06,43.69 83.06,42.42 | U$1.9 81.43,40.79 83.06,42.42 | 83.06,42.42 v83.06,39.62
  Bottom 0.305: TP4.TP 83.82,36.58 83.06,37.34 v83.06,39.62
+3V4  (via drill 0.35)
  Top 0.305: U8.2 77.38,179.88 C23.1 81.24,179.79 U$37.48 81.58,178.14 83.06,176.66 | 83.06,176.66 85.09,176.66 86.19,177.76 U$37.36 89.93,178.9 C22.1 | 83.06,176.66 83.06,175.39 | U$37.9 81.43,173.76 83.06,175.39 | 83.06,175.39 v83.06,172.59
  Bottom 0.305: TP19.TP 83.82,169.55 83.06,170.31 v83.06,172.59
+5V  (via drill 0.35)
  Top 0.152: R11.2 C7.1 46.32,39.07 C4.1
  Top 0.305: U1.1 v78.23,34.54 | C1.1 69.85,44.54 69.85,39.88 | 69.85,39.88 v69.85,36.47 | U1.20 v69.09,34.54 | 69.85,39.88 52.8,39.88 51.74,40.94
  Top 0.406: U2.3 72.99,45.97 C1.1
  Top 0.559: U$11.P$3 35.69,36.45 37.34,34.8 43.69,34.8 44.7,35.81 C4.1
  Top 0.635: L2.P$2 42.37,37.46 C4.1 48.26,37.46 51.74,40.94 J3.1 54.18,45.62 J5.4
  Bottom 0.305: v78.23,34.54 71.63,34.54 v69.09,34.54 69.09,35.71 v69.85,36.47
+5V1  (via drill 0.35)
  Top 0.152: R29.2 C11.1 46.32,83.4 C12.1
  Top 0.305: U3.1 v78.23,78.87 | C14.1 69.85,88.86 69.85,84.2 | 69.85,84.2 v69.85,80.8 | U3.20 v69.09,78.86 v69.09,78.87 | 69.85,84.2 52.8,84.2 51.74,85.26
  Top 0.406: U4.3 72.99,90.3 C14.1
  Top 0.559: U$23.P$3 35.69,80.77 37.34,79.12 43.69,79.12 44.7,80.14 C12.1
  Top 0.635: L1.P$2 42.37,81.79 C12.1 48.26,81.79 51.74,85.26 J7.1 54.18,89.94 J9.4
  Bottom 0.305: v78.23,78.87 71.63,78.87 v69.09,78.87 69.09,80.03 v69.85,80.8
+5V2  (via drill 0.35)
  Top 0.152: R47.2 C18.1 46.32,127.72 C19.1
  Top 0.305: U5.1 v78.23,123.19 | C21.1 69.85,133.18 69.85,128.52 | 69.85,128.52 v69.85,125.12 | U5.20 v69.09,123.19 | 69.85,128.52 52.8,128.52 51.74,129.58
  Top 0.406: U6.3 72.99,134.62 C21.1
  Top 0.559: U$35.P$3 35.69,125.09 37.34,123.45 43.69,123.45 44.7,124.46 C19.1
  Top 0.635: L3.P$2 42.37,126.11 C19.1 48.26,126.11 51.74,129.58 J13.1 54.18,134.27 J15.4
  Bottom 0.305: v78.23,123.19 71.63,123.19 v69.09,123.19 69.09,124.36 v69.85,125.12
+5V3  (via drill 0.35)
  Top 0.152: R65.2 C25.1 46.32,172.04 C26.1
  Top 0.305: U7.1 v78.23,167.51 | C28.1 69.85,177.51 69.85,172.85 | 69.85,172.85 v69.85,169.44 | U7.20 v69.09,167.51 | 69.85,172.85 52.8,172.85 51.74,173.91
  Top 0.406: U8.3 72.99,178.94 C28.1
  Top 0.559: U$47.P$3 35.69,169.42 37.34,167.77 43.69,167.77 44.7,168.78 C26.1
  Top 0.635: L4.P$2 42.37,170.43 C26.1 48.26,170.43 51.74,173.91 J19.1 54.18,178.59 J21.4
  Bottom 0.305: v78.23,167.51 71.63,167.51 v69.09,167.51 69.09,168.68 v69.85,169.44
ADDR0
  Top 0.152: J2.1 90.6,35.76 84.86,35.76 84.08,36.54 U$1.18
ADDR1
  Top 0.152: J2.2 89.51,36.04 84.97,36.04 84.58,36.44 U$1.19
ADDR2
  Top 0.152: J2.3 89.92,39.24 89.92,38.1 88.14,36.32 85.09,36.32 85.08,36.33 U$1.20
ADDR3
  Top 0.152: J11.1 90.6,80.09 84.86,80.09 84.08,80.87 U$13.18
ADDR4
  Top 0.152: J11.2 89.51,80.37 84.97,80.37 84.58,80.76 U$13.19
ADDR5
  Top 0.152: J11.3 89.92,83.57 89.92,82.42 88.14,80.65 85.09,80.65 85.08,80.66 U$13.20
ADDR6
  Top 0.152: J17.1 90.6,124.41 84.86,124.41 84.08,125.19 U$25.18
ADDR7
  Top 0.152: J17.2 89.51,124.69 84.97,124.69 84.58,125.09 U$25.19
ADDR8
  Top 0.152: J17.3 89.92,127.89 89.92,126.75 88.14,124.97 85.09,124.97 85.08,124.98 U$25.20
ADDR9
  Top 0.152: J23.1 90.6,168.73 84.86,168.73 84.08,169.51 U$37.18
ADDR10
  Top 0.152: J23.2 89.51,169.01 84.97,169.01 84.58,169.41 U$37.19
ADDR11
  Top 0.152: J23.3 89.92,172.21 89.92,171.07 88.14,169.29 85.09,169.29 85.08,169.3 U$37.20
CH0
  Top 0.152: U$1.17 83.57,37.57 83.57,36.58 82.18,35.19 U1.2
CH1
  Top 0.152: U$1.16 83.08,36.6 82.32,35.84 U1.3
CH2
  Top 0.152: U$1.15 82.58,36.6 82.21,36.24 78.23,36.24 77.98,36.49 U1.4
CH3
  Top 0.152: U$1.14 82.04,37.55 82.04,36.58 79.5,36.58 78.94,37.14 U1.5
CH4
  Top 0.152: U$1.13 81.38,37.79 U1.6
CH5
  Top 0.152: U1.7 78.06,38.44 78.91,39.29 U$1.12
CH6
  Top 0.152: U1.8 77.95,39.09 78.65,39.79 U$1.11
CH7
  Top 0.152: U1.9 77.84,39.74 78.39,40.29 U$1.10
CH8
  Top 0.152: U3.9 77.84,84.06 78.39,84.61 U$13.10
CH9
  Top 0.152: U3.8 77.95,83.41 78.65,84.11 U$13.11
CH10
  Top 0.152: U3.7 78.06,82.76 78.91,83.61 U$13.12
CH11
  Top 0.152: U$13.17 83.57,81.9 83.57,80.9 82.18,79.51 U3.2
CH12
  Top 0.152: U$13.16 83.08,80.92 82.32,80.16 U3.3
CH13
  Top 0.152: U$13.15 82.58,80.93 82.21,80.56 78.23,80.56 77.98,80.81 U3.4
CH14
  Top 0.152: U$13.14 82.04,81.87 82.04,80.9 79.5,80.9 78.94,81.46 U3.5
CH15
  Top 0.152: U$13.13 81.38,82.11 U3.6
CH16
  Top 0.152: U5.9 77.84,128.39 78.39,128.93 U$25.10
CH17
  Top 0.152: U5.8 77.95,127.74 78.65,128.43 U$25.11
CH18
  Top 0.152: U5.7 78.06,127.09 78.91,127.93 U$25.12
CH19
  Top 0.152: U$25.17 83.57,126.22 83.57,125.22 82.18,123.84 U5.2
CH20
  Top 0.152: U$25.16 83.08,125.24 82.32,124.49 U5.3
CH21
  Top 0.152: U$25.15 82.58,125.25 82.21,124.88 78.23,124.88 77.98,125.14 U5.4
CH22
  Top 0.152: U$25.14 82.04,126.2 82.04,125.22 79.5,125.22 78.94,125.79 U5.5
CH23
  Top 0.152: U$25.13 81.38,126.44 U5.6
CH24
  Top 0.152: U7.9 77.84,172.71 78.39,173.26 U$37.10
CH25
  Top 0.152: U7.8 77.95,172.06 78.65,172.76 U$37.11
CH26
  Top 0.152: U7.7 78.06,171.41 78.91,172.26 U$37.12
CH27
  Top 0.152: U$37.17 83.57,170.54 83.57,169.55 82.18,168.16 U7.2
CH28
  Top 0.152: U$37.16 83.08,169.56 82.32,168.81 U7.3
CH29
  Top 0.152: U$37.15 82.58,169.57 82.21,169.21 78.23,169.21 77.98,169.46 U7.4
CH30
  Top 0.152: U$37.14 82.04,170.52 82.04,169.55 79.5,169.55 78.94,170.11 U7.5
CH31
  Top 0.152: U$37.13 81.38,170.76 U7.6
GND  (via drill 0.35)
  Top 0.152: R10.2 75.44,44.28 75.44,45.12 | C5.2 42.55,45.21 R12.1 | Q3.1 26.6,34.86 v26.67,34.8
  Top 0.305: C2.2 78.36,44.23 78.36,41.79 | 78.36,41.79 78.36,41.03 77.72,40.39 U1.10 v75.95,40.39 | 78.36,41.79 78.36,41.54 78.62,41.29 U$1.8 | U2.1 75.81,45.12 C2.2 | U2.1 75.63,45.12 75.44,45.12 C1.2 v72.14,43.94 | 75.63,44.87 75.55,44.87 U2.1 | U$1.35 90.88,44.29 C3.2 91.91,44.23 v91.95,44.2 | U$1.47 82.08,48.73 v82.04,48.77 | U$1.44 83.57,46.5 v83.57,48.77 | U1.19 70.09,35.19 v70.05,35.23 | C2.2 78.4,45.12 v78.41,45.14
  Top 0.559: C5.2 41.15,43.3 41.15,41.91 41.4,41.66 U$4.2 43.18,41.66 44.57,40.26 C4.2 | J5.1 63.72,46.35 J4.2
  Top 0.635: C4.2 45.21,40.26 v45.21,40.64 | v42.93,45.21 42.93,45.08 C5.2
  Bottom 0.635: U$9.1 v56.39,11.94 | U$10.1 v80.52,11.94
  Bottom 1.016: U$8.1 v30.99,11.94 | U$9.1 v55.12,11.94 | U$10.1 v79.25,11.94
  other vias: 42.93,44.2 44.2,40.64 32.26,11.94
  pour Bottom (isolate 0.254, rank 6): 6.86,50.8 102.11,50.8 102.11,6.86 6.86,6.86
  pour Top (isolate 0.254): 102.11,15.75 102.11,6.86 6.86,6.86 6.86,50.55 19.56,50.55 19.56,36.07 15.75,32.26 15.75,15.75
GND1  (via drill 0.35)
  Top 0.152: R27.2 75.44,88.61 75.44,89.45 | C10.2 42.55,89.54 R30.1 | Q1.1 26.6,79.19 v26.67,79.12
  Top 0.305: C9.2 78.36,88.55 78.36,86.12 | 78.36,86.12 78.36,85.36 77.72,84.71 U3.10 v75.95,84.71 | 78.36,86.12 78.36,85.86 78.62,85.61 U$13.8 | U4.1 75.81,89.45 C9.2 | U4.1 75.63,89.45 75.44,89.45 C14.2 v72.14,88.27 | 75.63,89.19 75.55,89.19 U4.1 | U$13.35 90.88,88.61 C8.2 91.91,88.56 v91.95,88.52 | U$13.47 82.08,93.06 v82.04,93.09 | U$13.44 83.57,90.82 v83.57,93.09 | U3.19 70.09,79.51 v70.05,79.55 | C9.2 78.4,89.45 v78.41,89.46
  Top 0.559: C10.2 41.15,87.63 41.15,86.23 41.4,85.98 U$14.2 43.18,85.98 44.57,84.59 C12.2 | J9.1 63.72,90.68 J8.2
  Top 0.635: C12.2 45.21,84.59 v45.21,84.96 | v42.93,89.54 42.93,89.41 C10.2
  Bottom 0.635: U$21.1 v56.39,56.26 | U$22.1 v80.52,56.26
  Bottom 1.016: U$20.1 v30.99,56.26 | U$21.1 v55.12,56.26 | U$22.1 v79.25,56.26
  other vias: 42.93,88.52 44.2,84.96 32.26,56.26
  pour Bottom (isolate 0.254, rank 6): 6.86,95.12 102.11,95.12 102.11,51.18 6.86,51.18
  pour Top (isolate 0.254): 102.11,60.07 102.11,51.18 6.86,51.18 6.86,94.87 19.56,94.87 19.56,80.39 15.75,76.58 15.75,60.07
GND2  (via drill 0.35)
  Top 0.152: R45.2 75.44,132.93 75.44,133.77 | C17.2 42.55,133.86 R48.1 | Q2.1 26.6,123.51 v26.67,123.44
  Top 0.305: C16.2 78.36,132.88 78.36,130.44 | 78.36,130.44 78.36,129.68 77.72,129.04 U5.10 v75.95,129.03 | 78.36,130.44 78.36,130.19 78.62,129.93 U$25.8 | U6.1 75.81,133.77 C16.2 | U6.1 75.63,133.77 75.44,133.77 C21.2 v72.14,132.59 | 75.63,133.52 75.55,133.52 U6.1 | U$25.35 90.88,132.93 C15.2 91.91,132.88 v91.95,132.84 | U$25.47 82.08,137.38 v82.04,137.41 | U$25.44 83.57,135.15 v83.57,137.41 | U5.19 70.09,123.84 v70.05,123.87 | C16.2 v78.4,133.77 v78.41,133.78
  Top 0.559: C17.2 41.15,131.95 41.15,130.56 41.4,130.3 U$26.2 43.18,130.3 44.57,128.91 C19.2 | J15.1 63.72,135 J14.2
  Top 0.635: C19.2 45.21,128.91 v45.21,129.29 | v42.93,133.86 42.93,133.73 C17.2
  Bottom 0.635: U$33.1 v56.39,100.58 | U$34.1 v80.52,100.58
  Bottom 1.016: U$32.1 v30.99,100.58 | U$33.1 v55.12,100.58 | U$34.1 v79.25,100.58
  other vias: 42.93,132.84 44.2,129.29 32.26,100.58
  pour Bottom (isolate 0.254, rank 6): 6.86,139.45 102.11,139.45 102.11,95.5 6.86,95.5
  pour Top (isolate 0.254): 102.11,104.39 102.11,95.5 6.86,95.5 6.86,139.19 19.56,139.19 19.56,124.71 15.75,120.9 15.75,104.39
GND3  (via drill 0.35)
  Top 0.152: R63.2 75.44,177.25 75.44,178.09 | C24.2 42.55,178.18 R66.1 | Q4.1 26.6,167.83 v26.67,167.77
  Top 0.305: C23.2 78.36,177.2 78.36,174.76 | 78.36,174.76 78.36,174 77.72,173.36 U7.10 v75.95,173.36 | 78.36,174.76 78.36,174.51 78.62,174.26 U$37.8 | U8.1 75.81,178.09 C23.2 | U8.1 75.63,178.09 75.44,178.09 C28.2 v72.14,176.91 | 75.63,177.84 75.55,177.84 U8.1 | U$37.35 90.88,177.26 C22.2 91.91,177.2 v91.95,177.16 | U$37.47 82.08,181.7 v82.04,181.74 | U$37.44 83.57,179.47 v83.57,181.74 | U7.19 70.09,168.16 v70.05,168.2 | C23.2 78.4,178.09 v78.41,178.11
  Top 0.559: C24.2 41.15,176.27 41.15,174.88 41.4,174.62 U$38.2 43.18,174.62 44.57,173.23 C26.2 | J21.1 63.72,179.32 J20.2
  Top 0.635: C26.2 45.21,173.23 v45.21,173.61 | v42.93,178.18 42.93,178.05 C24.2
  Bottom 0.635: U$45.1 v56.39,144.91 | U$46.1 v80.52,144.91
  Bottom 1.016: U$44.1 v30.99,144.91 | U$45.1 v55.12,144.91 | U$46.1 v79.25,144.91
  other vias: 42.93,177.16 44.2,173.61 32.26,144.91
  pour Bottom (isolate 0.254, rank 6): 6.86,183.77 102.11,183.77 102.11,139.83 6.86,139.83
  pour Top (isolate 0.254): 102.11,148.72 102.11,139.83 6.86,139.83 6.86,183.52 19.56,183.52 19.56,169.04 15.75,165.23 15.75,148.72
LED0
  Top 0.152: R1.2 15.75,22.52 U$2.2
LED1
  Top 0.152: R2.2 39.03,28.87 U$3.2
LED2
  Top 0.152: R3.2 63.16,28.87 U$5.2
LED3
  Top 0.152: U$6.2 88.14,22.9 88.94,22.1 R4.2
LED4
  Top 0.152: R5.2 16.17,12.36 U$7.2
LED5
  Top 0.152: R6.2 39.03,12.79 U$8.2
LED6
  Top 0.152: R7.2 63.16,12.79 U$9.2
LED7
  Top 0.152: R8.2 88.94,19.56 88.14,18.76 U$10.2
LED8
  Top 0.152: R24.2 39.03,57.11 U$20.2
LED9
  Top 0.152: R23.2 16.17,56.68 U$19.2
LED10
  Top 0.152: U$18.2 88.14,67.22 88.94,66.42 R22.2
LED11
  Top 0.152: R21.2 63.16,73.19 U$17.2
LED12
  Top 0.152: R20.2 39.03,73.19 U$16.2
LED13
  Top 0.152: R19.2 15.75,66.84 U$15.2
LED14
  Top 0.152: R25.2 63.16,57.11 U$21.2
LED15
  Top 0.152: R26.2 88.94,63.88 88.14,63.08 U$22.2
LED16
  Top 0.152: R42.2 39.03,101.43 U$32.2
LED17
  Top 0.152: R41.2 16.17,101 U$31.2
LED18
  Top 0.152: U$30.2 88.14,111.54 88.94,110.74 R40.2
LED19
  Top 0.152: R39.2 63.16,117.51 U$29.2
LED20
  Top 0.152: R38.2 39.03,117.51 U$28.2
LED21
  Top 0.152: R37.2 15.75,111.16 U$27.2
LED22
  Top 0.152: R43.2 63.16,101.43 U$33.2
LED23
  Top 0.152: R44.2 88.94,108.2 88.14,107.4 U$34.2
LED24
  Top 0.152: R60.2 39.03,145.76 U$44.2
LED25
  Top 0.152: R59.2 16.17,145.33 U$43.2
LED26
  Top 0.152: U$42.2 88.14,155.87 88.94,155.07 R58.2
LED27
  Top 0.152: R57.2 63.16,161.84 U$41.2
LED28
  Top 0.152: R56.2 39.03,161.84 U$40.2
LED29
  Top 0.152: R55.2 15.75,155.49 U$39.2
LED30
  Top 0.152: R61.2 63.16,145.76 U$45.2
LED31
  Top 0.152: R62.2 88.94,152.53 88.14,151.73 U$46.2
LEDS0
  Top 0.152: U1.18 68.84,35.84 67.06,34.06 33.21,34.06 30.99,31.84 30.99,25.91 28.45,23.37 21.61,23.37 20.83,22.59 20.83,21.61 20.61,21.39 19.34,21.39 18.64,22.1 R1.1
LEDS1
  Top 0.152: U1.17 71.66,36.49 72.08,36.08 72.08,34.3 71.16,33.38 43.54,33.38 42.42,32.26 42.42,25.91 40.73,24.22 R2.1
LEDS2
  Top 0.152: U1.16 71.66,37.14 72.36,36.45 72.36,34.19 71.25,33.08 67.71,33.08 66.46,31.84 66.46,23.7 R3.1
LEDS3
  Top 0.152: U1.15 71.03,37.79 70.68,38.15 70.68,40.63 70.8,40.75 71.96,40.75 75.73,36.97 75.73,33.86 78.67,30.92 78.67,26.23 82.8,22.1 R4.1
LEDS4
  Top 0.152: U1.14 71.66,38.44 72.89,37.21 72.89,34.07 71.36,32.54 67.82,32.54 66.89,31.61 66.89,22.79 65.15,21.06 19.37,21.06 R5.1
LEDS5
  Top 0.152: U1.13 71.66,39.09 73.17,37.58 73.17,32.99 71.54,31.36 71.54,25.31 69.09,22.86 69.09,21.61 68.06,20.58 41.75,20.58 R6.1
LEDS6  (via drill 0.35)
  Top 0.152: R14.1 45.72,22.1 | 45.72,22.1 45.38,22.1 45.72,22.1 | 45.72,22.1 v61.47,22.1 | R13.1 37.59,22.1 38.35,21.34 44.96,21.34 45.72,22.1 | U1.12 71.66,39.74 73.45,37.95 73.45,32.66 71.97,31.18 71.97,24.13 R15.1 69.94,21.68 67.91,19.65 v66.04,19.65 64.95,19.65 R7.1
  Bottom 0.152: v61.47,22.1 62.74,20.83 63.92,19.65 v66.04,19.65
LEDS7
  Top 0.152: R16.1 91.05,22.1 89.78,20.83 88.61,20.83 87.34,19.56 R8.1 | U1.11 71.72,40.39 75.31,36.8 75.31,33.13 78.11,30.34 78.11,25.9 84.44,19.56 R8.1 | R17.1 36.07,19.56 36.77,20.26 39.66,20.26 39.97,19.95 39.97,18.97 40.09,18.86 43.4,18.86 R18.1 44.81,20.26 63.79,20.26 64.01,20.04 64.01,19.07 64.22,18.86 86.59,18.86 R8.1
LEDS8
  Top 0.152: U3.18 68.84,80.16 67.06,78.39 33.21,78.39 30.99,76.16 30.99,70.23 28.45,67.69 21.61,67.69 20.83,66.91 20.83,65.93 20.61,65.72 19.34,65.72 18.64,66.42 R19.1
LEDS9
  Top 0.152: U3.17 71.66,80.81 72.08,80.4 72.08,78.63 71.16,77.71 43.54,77.71 42.42,76.58 42.42,70.23 40.73,68.54 R20.1
LEDS10
  Top 0.152: U3.16 71.66,81.46 72.36,80.77 72.36,78.51 71.25,77.41 67.71,77.41 66.46,76.16 66.46,68.03 R21.1
LEDS11
  Top 0.152: U3.15 71.03,82.11 70.68,82.47 70.68,84.95 70.8,85.07 71.96,85.07 75.73,81.29 75.73,78.18 78.67,75.24 78.67,70.55 82.8,66.42 R22.1
LEDS12
  Top 0.152: U3.14 71.66,82.76 72.89,81.54 72.89,78.4 71.36,76.87 67.82,76.87 66.89,75.94 66.89,67.11 65.15,65.38 19.37,65.38 R23.1
LEDS13
  Top 0.152: U3.13 71.66,83.41 73.17,81.91 73.17,77.31 71.54,75.69 71.54,69.63 69.09,67.18 69.09,65.94 68.06,64.9 41.75,64.9 R24.1
LEDS14  (via drill 0.35)
  Top 0.152: R32.1 45.72,66.42 | 45.72,66.42 45.38,66.42 45.72,66.42 | 45.72,66.42 v61.47,66.42 | R31.1 37.59,66.42 38.35,65.66 44.96,65.66 45.72,66.42 | U3.12 71.66,84.06 73.45,82.28 73.45,76.98 71.97,75.5 71.97,68.45 R33.1 69.94,66 67.91,63.97 v66.04,63.97 64.95,63.97 R25.1
  Bottom 0.152: v61.47,66.42 62.74,65.15 63.92,63.97 v66.04,63.97
LEDS15
  Top 0.152: R34.1 91.05,66.42 89.78,65.15 88.61,65.15 87.34,63.88 R26.1 | U3.11 71.72,84.71 75.31,81.12 75.31,77.45 78.11,74.66 78.11,70.22 84.44,63.88 R26.1 | R35.1 36.07,63.88 36.77,64.58 39.66,64.58 39.97,64.27 39.97,63.3 40.09,63.18 43.4,63.18 R36.1 44.81,64.58 63.79,64.58 64.01,64.37 64.01,63.39 64.22,63.18 86.59,63.18 R26.1
LEDS16
  Top 0.152: U5.18 68.84,124.49 67.06,122.71 33.21,122.71 30.99,120.48 30.99,114.55 28.45,112.01 21.61,112.01 20.83,111.23 20.83,110.26 20.61,110.04 19.34,110.04 18.64,110.74 R37.1
LEDS17
  Top 0.152: U5.17 71.66,125.14 72.08,124.72 72.08,122.95 71.16,122.03 43.54,122.03 42.42,120.9 42.42,114.55 40.73,112.86 R38.1
LEDS18
  Top 0.152: U5.16 71.66,125.79 72.36,125.09 72.36,122.83 71.25,121.73 67.71,121.73 66.46,120.49 66.46,112.35 R39.1
LEDS19
  Top 0.152: U5.15 71.03,126.44 70.68,126.79 70.68,129.27 70.8,129.39 71.96,129.39 75.73,125.62 75.73,122.51 78.67,119.56 78.67,114.88 82.8,110.74 R40.1
LEDS20
  Top 0.152: U5.14 71.66,127.09 72.89,125.86 72.89,122.72 71.36,121.19 67.82,121.19 66.89,120.26 66.89,111.44 65.15,109.7 19.37,109.7 R41.1
LEDS21
  Top 0.152: U5.13 71.66,127.74 73.17,126.23 73.17,121.63 71.54,120.01 71.54,113.95 69.09,111.5 69.09,110.26 68.06,109.23 41.75,109.23 R42.1
LEDS22  (via drill 0.35)
  Top 0.152: R50.1 45.72,110.74 | 45.72,110.74 45.38,110.74 45.72,110.74 | 45.72,110.74 v61.47,110.74 | R49.1 37.59,110.74 38.35,109.98 44.96,109.98 45.72,110.74 | U5.12 71.66,128.39 73.45,126.6 73.45,121.3 71.97,119.82 71.97,112.77 R51.1 69.94,110.32 67.91,108.29 v66.04,108.29 64.95,108.29 R43.1
  Bottom 0.152: v61.47,110.74 62.74,109.47 63.92,108.29 v66.04,108.29
LEDS23
  Top 0.152: R52.1 91.05,110.74 89.78,109.47 88.61,109.47 87.34,108.2 R44.1 | U5.11 71.72,129.04 75.31,125.44 75.31,121.77 78.11,118.98 78.11,114.54 84.44,108.2 R44.1 | R53.1 36.07,108.2 36.77,108.91 39.66,108.91 39.97,108.59 39.97,107.62 40.09,107.5 43.4,107.5 R54.1 44.81,108.91 63.79,108.91 64.01,108.69 64.01,107.72 64.22,107.5 86.59,107.5 R44.1
LEDS24
  Top 0.152: U7.18 68.84,168.81 67.06,167.03 33.21,167.03 30.99,164.81 30.99,158.88 28.45,156.34 21.61,156.34 20.83,155.55 20.83,154.58 20.61,154.36 19.34,154.36 18.64,155.07 R55.1
LEDS25
  Top 0.152: U7.17 71.66,169.46 72.08,169.05 72.08,167.27 71.16,166.35 43.54,166.35 42.42,165.23 42.42,158.88 40.73,157.19 R56.1
LEDS26
  Top 0.152: U7.16 71.66,170.11 72.36,169.42 72.36,167.16 71.25,166.05 67.71,166.05 66.46,164.81 66.46,156.67 R57.1
LEDS27
  Top 0.152: U7.15 71.03,170.76 70.68,171.12 70.68,173.6 70.8,173.72 71.96,173.72 75.73,169.94 75.73,166.83 78.67,163.89 78.67,159.2 82.8,155.07 R58.1
LEDS28
  Top 0.152: U7.14 71.66,171.41 72.89,170.18 72.89,167.04 71.36,165.51 67.82,165.51 66.89,164.58 66.89,155.76 65.15,154.03 19.37,154.03 R59.1
LEDS29
  Top 0.152: U7.13 71.66,172.06 73.17,170.55 73.17,165.96 71.54,164.33 71.54,158.28 69.09,155.83 69.09,154.58 68.06,153.55 41.75,153.55 R60.1
LEDS30  (via drill 0.35)
  Top 0.152: R68.1 45.72,155.07 | 45.72,155.07 45.38,155.07 45.72,155.07 | 45.72,155.07 v61.47,155.07 | R67.1 37.59,155.07 38.35,154.31 44.96,154.31 45.72,155.07 | U7.12 71.66,172.71 73.45,170.92 73.45,165.62 71.97,164.14 71.97,157.1 R69.1 69.94,154.65 67.91,152.62 v66.04,152.62 64.95,152.62 R61.1
  Bottom 0.152: v61.47,155.07 62.74,153.8 63.92,152.62 v66.04,152.62
LEDS31
  Top 0.152: R70.1 91.05,155.07 89.78,153.8 88.61,153.8 87.34,152.53 R62.1 | U7.11 71.72,173.36 75.31,169.77 75.31,166.1 78.11,163.31 78.11,158.87 84.44,152.53 R62.1 | R71.1 36.07,152.53 36.77,153.23 39.66,153.23 39.97,152.92 39.97,151.94 40.09,151.82 43.4,151.82 R72.1 44.81,153.23 63.79,153.23 64.01,153.01 64.01,152.04 64.22,151.82 86.59,151.82 R62.1
N$1
  Top 0.152: R9.1 92.14,46.06 88.93,49.27 77.13,49.27 75.86,48.01 60.65,48.01 J5.2
  Top 0.406: J4.1 59.26,45.82 J5.2
N$2
  Top 0.152: D1.C 74.98,86.15 R27.1
N$3  (via drill 0.35)
  Top 0.152: U$1.4 81.43,43.29 v81.53,43.18 | v77.65,41.93 77.51,41.79 D2.A
  Bottom 0.152: v81.53,43.18 80.29,41.93 v77.65,41.93
N$4
  Top 0.152: R28.1 92.14,90.39 88.93,93.6 77.13,93.6 75.86,92.33 60.65,92.33 J9.2
  Top 0.406: J8.1 59.26,90.14 J9.2
N$5  (via drill 0.35)
  Top 0.152: U$13.4 81.43,87.61 v81.53,87.5 | v77.65,86.26 77.51,86.12 D1.A
  Bottom 0.152: v81.53,87.5 80.29,86.26 v77.65,86.26
N$6
  Top 0.152: R13.2 19.98,28.87 U$2.3
N$7
  Top 0.152: R14.2 44.11,28.87 U$3.3
N$8
  Top 0.559: C6.1 42.45,40.32 U$4.1
N$9
  Top 0.559: L2.P$1 39.85,37.54 39.85,39.62 | 39.85,39.62 U$4.6 | C6.2 39.85,39.62
N$10
  Top 0.152: R12.2 44.79,43.69 R11.1 C7.2 43.94,42.16 43.5,42.61 U$4.3
N$11
  Top 0.152: R15.2 68.24,28.87 U$5.3
N$12
  Top 0.559: C13.1 42.45,84.65 U$14.1
N$13
  Top 0.559: L1.P$1 39.85,81.86 39.85,83.95 | 39.85,83.95 U$14.6 | C13.2 39.85,83.95
N$14
  Top 0.152: R30.2 44.79,88.01 R29.1 C11.2 43.94,86.49 43.5,86.93 U$14.3
N$15
  Top 0.152: R31.2 19.98,73.19 U$15.3
N$16
  Top 0.152: R32.2 44.11,73.19 U$16.3
N$17
  Top 0.152: R33.2 68.24,73.19 U$17.3
N$18
  Top 0.152: U$18.3 93.22,66.84 R34.2
N$19
  Top 0.152: R35.2 19.98,57.11 U$19.3
N$20
  Top 0.152: U$6.3 93.22,22.52 R16.2
N$21
  Top 0.152: D2.C 74.98,41.82 R10.1
N$22
  Top 0.152: R17.2 19.98,12.79 U$7.3
N$23
  Top 0.152: R18.2 45.76,19.56 44.96,18.76 U$8.3
N$24
  Top 0.152: R36.2 45.76,63.88 44.96,63.08 U$20.3
N$25
  Top 0.152: D3.C 74.98,130.47 R45.1
N$26
  Top 0.152: R46.1 92.14,134.71 88.93,137.92 77.13,137.92 75.86,136.65 60.65,136.65 J15.2
  Top 0.406: J14.1 59.26,134.47 J15.2
N$27  (via drill 0.35)
  Top 0.152: U$25.4 81.43,131.93 v81.53,131.83 | v77.65,130.58 77.51,130.44 D3.A
  Bottom 0.152: v81.53,131.83 80.29,130.58 v77.65,130.58
N$28
  Top 0.559: C20.1 42.45,128.97 U$26.1
N$29
  Top 0.559: L3.P$1 39.85,126.18 39.85,128.27 | 39.85,128.27 U$26.6 | C20.2 39.85,128.27
N$30
  Top 0.152: R48.2 44.79,132.33 R47.1 C18.2 43.94,130.81 43.5,131.25 U$26.3
N$31
  Top 0.152: R49.2 19.98,117.51 U$27.3
N$32
  Top 0.152: R50.2 44.11,117.51 U$28.3
N$33
  Top 0.152: R51.2 68.24,117.51 U$29.3
N$34
  Top 0.152: U$30.3 93.22,111.16 R52.2
N$35
  Top 0.152: R53.2 19.98,101.43 U$31.3
N$36
  Top 0.152: R54.2 45.76,108.2 44.96,107.4 U$32.3
N$37
  Top 0.152: D4.C 74.98,174.79 R63.1
N$38
  Top 0.152: R64.1 92.14,179.03 88.93,182.24 77.13,182.24 75.86,180.97 60.65,180.97 J21.2
  Top 0.406: J20.1 59.26,178.79 J21.2
N$39  (via drill 0.35)
  Top 0.152: U$37.4 81.43,176.26 v81.53,176.15 | v77.65,174.9 77.51,174.76 D4.A
  Bottom 0.152: v81.53,176.15 80.29,174.9 v77.65,174.9
N$40
  Top 0.559: C27.1 42.45,173.29 U$38.1
N$41
  Top 0.559: L4.P$1 39.85,170.51 39.85,172.59 | 39.85,172.59 U$38.6 | C27.2 39.85,172.59
N$42
  Top 0.152: R66.2 44.79,176.66 R65.1 C25.2 43.94,175.13 43.5,175.58 U$38.3
N$43
  Top 0.152: R67.2 19.98,161.84 U$39.3
N$44
  Top 0.152: R68.2 44.11,161.84 U$40.3
N$45
  Top 0.152: R69.2 68.24,161.84 U$41.3
N$46
  Top 0.152: U$42.3 93.22,155.49 R70.2
N$47
  Top 0.152: R71.2 19.98,145.76 U$43.3
N$48
  Top 0.152: R72.2 45.76,152.53 44.96,151.73 U$44.3
NRST  (via drill 0.35)
  Top 0.152: v81.53,41.91 81.41,41.79 U$1.7
  Bottom 0.152: TP5.TP 83.57,46.74 82.55,45.72 82.55,42.97 81.53,41.96 v81.53,41.91
NRST1  (via drill 0.35)
  Top 0.152: v81.53,86.23 81.41,86.11 U$13.7
  Bottom 0.152: TP10.TP 83.57,91.06 82.55,90.04 82.55,87.29 81.53,86.28 v81.53,86.23
NRST2  (via drill 0.35)
  Top 0.152: v81.53,130.56 81.41,130.43 U$25.7
  Bottom 0.152: TP15.TP 83.57,135.38 82.55,134.36 82.55,131.62 81.53,130.6 v81.53,130.56
NRST3  (via drill 0.35)
  Top 0.152: v81.53,174.88 81.41,174.76 U$37.7
  Bottom 0.152: TP20.TP 83.57,179.71 82.55,178.69 82.55,175.94 81.53,174.93 v81.53,174.88
RX
  Top 0.152: U$1.30 89.79,41.79 90.93,42.93 91.78,42.93 R9.2
RX1
  Top 0.152: U$13.30 89.79,86.11 90.93,87.25 91.78,87.25 R28.2
RX2
  Top 0.152: U$25.30 89.79,130.43 90.93,131.57 91.78,131.57 R46.2
RX3
  Top 0.152: U$37.30 89.79,174.76 90.93,175.9 91.78,175.9 R64.2
SWCLK  (via drill 0.35)
  Top 0.152: v87.88,46.23 87.34,46.23 U$1.37
  Bottom 0.152: TP1.TP 87.63,46.23 v87.88,46.23
SWCLK1  (via drill 0.35)
  Top 0.152: v87.88,90.55 87.34,90.55 U$13.37
  Bottom 0.152: TP6.TP 87.63,90.55 v87.88,90.55
SWCLK2  (via drill 0.35)
  Top 0.152: v87.88,134.87 87.34,134.87 U$25.37
  Bottom 0.152: TP11.TP 87.63,134.87 v87.88,134.87
SWCLK3  (via drill 0.35)
  Top 0.152: v87.88,179.2 87.34,179.2 U$37.37
  Bottom 0.152: TP16.TP 87.63,179.2 v87.88,179.2
SWDIO  (via drill 0.35)
  Top 0.152: v87.38,43.69 87.48,43.79 U$1.34
  Bottom 0.152: TP2.TP 86.11,41.66 87.38,42.93 v87.38,43.69
SWDIO1  (via drill 0.35)
  Top 0.152: v87.38,88.01 87.48,88.11 U$13.34
  Bottom 0.152: TP7.TP 86.11,85.98 87.38,87.25 v87.38,88.01
SWDIO2  (via drill 0.35)
  Top 0.152: v87.38,132.33 87.48,132.43 U$25.34
  Bottom 0.152: TP12.TP 86.11,130.3 87.38,131.57 v87.38,132.33
SWDIO3  (via drill 0.35)
  Top 0.152: v87.38,176.66 87.48,176.76 U$37.34
  Bottom 0.152: TP17.TP 86.11,174.62 87.38,175.9 v87.38,176.66
VIN  (via drill 0.35)
  other vias: 22.1,44.96 22.1,41.4 23.88,43.18 20.07,43.18
  pour Top (isolate 0.254, rank 5): 19.56,46.48 25.65,46.48 25.65,34.8 29.72,30.73 29.72,27.18 28.45,25.91 23.37,25.91 22.1,27.18 22.1,30.99 19.56,33.53
  pour Bottom (isolate 0.254): 19.56,46.23 19.56,6.86 102.11,6.86 102.11,15.75 32.26,15.75 29.72,18.29 29.72,31.24 26.16,34.8 26.16,46.23
  pour Bottom (isolate 0.254): 47.5,32.26 52.58,32.26 52.58,11.94 47.5,11.94
  pour Bottom (isolate 0.254): 71.63,32.26 76.71,32.26 76.71,11.94 71.63,11.94
  pour Bottom (isolate 0.254): 91.95,32.26 102.11,32.26 102.11,11.94 91.95,11.94
VIN1
  Top 0.559: U$4.5 U$4.4 39.75,42.71 C5.1
  Top 0.635: Q3.2 30.02,41.15 U$11.P$2 33.78,44.7 C5.1
VIN2  (via drill 0.35)
  other vias: 22.1,89.28 22.1,85.73 23.88,87.5 20.07,87.5
  pour Top (isolate 0.254, rank 5): 19.56,90.81 25.65,90.81 25.65,79.12 29.72,75.06 29.72,71.5 28.45,70.23 23.37,70.23 22.1,71.5 22.1,75.31 19.56,77.85
  pour Bottom (isolate 0.254): 19.56,90.55 19.56,51.18 102.11,51.18 102.11,60.07 32.26,60.07 29.72,62.61 29.72,75.56 26.16,79.12 26.16,90.55
  pour Bottom (isolate 0.254): 47.5,76.58 52.58,76.58 52.58,56.26 47.5,56.26
  pour Bottom (isolate 0.254): 71.63,76.58 76.71,76.58 76.71,56.26 71.63,56.26
  pour Bottom (isolate 0.254): 91.95,76.58 102.11,76.58 102.11,56.26 91.95,56.26
VIN3
  Top 0.559: U$14.5 U$14.4 39.75,87.03 C10.1
  Top 0.635: Q1.2 30.02,85.47 U$23.P$2 33.78,89.03 C10.1
VIN4  (via drill 0.35)
  other vias: 22.1,133.6 22.1,130.05 23.88,131.83 20.07,131.83
  pour Top (isolate 0.254, rank 5): 19.56,135.13 25.65,135.13 25.65,123.44 29.72,119.38 29.72,115.82 28.45,114.55 23.37,114.55 22.1,115.82 22.1,119.63 19.56,122.17
  pour Bottom (isolate 0.254): 19.56,134.87 19.56,95.5 102.11,95.5 102.11,104.39 32.26,104.39 29.72,106.93 29.72,119.89 26.16,123.44 26.16,134.87
  pour Bottom (isolate 0.254): 47.5,120.9 52.58,120.9 52.58,100.58 47.5,100.58
  pour Bottom (isolate 0.254): 71.63,120.9 76.71,120.9 76.71,100.58 71.63,100.58
  pour Bottom (isolate 0.254): 91.95,120.9 102.11,120.9 102.11,100.58 91.95,100.58
VIN5
  Top 0.559: U$26.5 U$26.4 39.75,131.35 C17.1
  Top 0.635: Q2.2 30.02,129.79 U$35.P$2 33.78,133.35 C17.1
VIN6  (via drill 0.35)
  other vias: 22.1,177.93 22.1,174.37 23.88,176.15 20.07,176.15
  pour Top (isolate 0.254, rank 5): 19.56,179.45 25.65,179.45 25.65,167.77 29.72,163.7 29.72,160.15 28.45,158.88 23.37,158.88 22.1,160.15 22.1,163.96 19.56,166.5
  pour Bottom (isolate 0.254): 19.56,179.2 19.56,139.83 102.11,139.83 102.11,148.72 32.26,148.72 29.72,151.26 29.72,164.21 26.16,167.77 26.16,179.2
  pour Bottom (isolate 0.254): 47.5,165.23 52.58,165.23 52.58,144.91 47.5,144.91
  pour Bottom (isolate 0.254): 71.63,165.23 76.71,165.23 76.71,144.91 71.63,144.91
  pour Bottom (isolate 0.254): 91.95,165.23 102.11,165.23 102.11,144.91 91.95,144.91
VIN7
  Top 0.559: U$38.5 U$38.4 39.75,175.68 C24.1
  Top 0.635: Q4.2 30.02,174.12 U$47.P$2 33.78,177.67 C24.1

## Text on the board
tPlace: VIN | GND | Voltage Select | 5v | DAT | GND | 12v | Address | 4 | 2 | VIN | GND | 5v | DAT | GND | 5v | 1 | v1.0 / 2020 Ben Hencke | electromage.com | G D0 C1 V+ | G D1 C1 V+ | G D2 C1 V+ | G D3 C2 V+ | G D4 C2 V+ | G D5 C2 V+ | G D6 V+ | G D7 V+ | VIN | GND | Voltage Select | 5v | DAT | GND | 12v | Address | 4 | 2 | VIN | GND | 5v | DAT | GND | 5v | 1 | v1.0 / 2020 Ben Hencke | electromage.com | G D0 C1 V+ | G D1 C1 V+ | G D2 C1 V+ | G D3 C2 V+ | G D4 C2 V+ | G D5 C2 V+ | G D6 V+ | G D7 V+ | VIN | GND | Voltage Select | 5v | DAT | GND | 12v | Address | 4 | 2 | VIN | GND | 5v | DAT | GND | 5v | 1 | v1.0 / 2020 Ben Hencke | electromage.com | G D0 C1 V+ | G D1 C1 V+ | G D2 C1 V+ | G D3 C2 V+ | G D4 C2 V+ | G D5 C2 V+ | G D6 V+ | G D7 V+ | VIN | GND | Voltage Select | 5v | DAT | GND | 12v | Address | 4 | 2 | VIN | GND | 5v | DAT | GND | 5v | 1 | v1.0 / 2020 Ben Hencke | electromage.com | G D0 C1 V+ | G D1 C1 V+ | G D2 C1 V+ | G D3 C2 V+ | G D4 C2 V+ | G D5 C2 V+ | G D6 V+ | G D7 V+
bPlace: v1.0 2020 Ben Hencke / electromage.com | v1.0 2020 Ben Hencke / electromage.com | v1.0 2020 Ben Hencke / electromage.com | v1.0 2020 Ben Hencke / electromage.com
Milling: v-score | v-score | v-score | v-score | v-score | v-score | v-score
_bNames: GND | R | 5v | DAT | C | D | G | 3v | R | 5v | GND | C | DAT | D | G | 3v | R | GND | 5v | DAT | C | D | G | 3v | R | GND | 5v | DAT | C | D | G | 3v